# EAGLE board RHC12 (EAGLE 7.5.0)
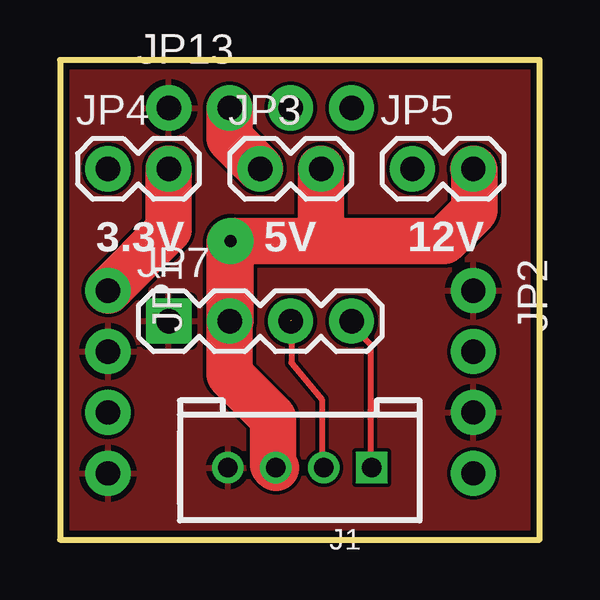
[diagram p0: board, top side]
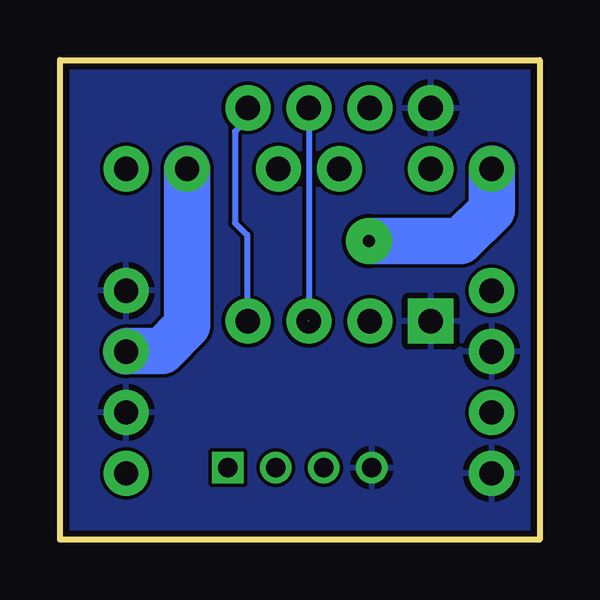
[diagram p1: board, bottom side, seen from below]

Size 20 x 20 mm. Coordinates in mm from the lower left corner, seen from the top.
Outline: 0,0 20,0 20,20 0,20 0,0
Copper layers (1*16): Top 0.035mm / dielectric 1.5mm / Bottom 0.035mm
Design rules "SeeedStudio_2layer_DRU_no_angle_20140221": minimum track width 6mil, minimum drill 12mil, track to track 6mil, track to pad 6mil, pad to pad 6mil, via to via 6mil, smd to smd 0mil, copper to edge 10mil, drill to drill 10mil, minimum pad ring 10mil, minimum via ring 6mil, stop-mask expansion 2mil, vias tented up to drill 100mil, thermal gap 10mil

## Footprints (pad centres in the part's own frame; a part is rotated, then mirrored left to right if it is on the bottom)
HW4-2.0 = drill 0.8 pad 1.27 square: 1 -3,0 | drill 0.8 pad 1.27: 2 -1,0; 3 1,0; 4 3,0
1X04_NO_SILK_ALL_ROUND = drill 1.016 pad 1.88: 1 0,0; 2 2.54,0; 3 5.08,0; 4 7.62,0
1X02 = drill 1.016 pad 1.88: 1 0,0; 2 2.54,0
1X04 = drill 1.016 pad 1.88 square: 1 0,0 | drill 1.016 pad 1.88: 2 2.54,0; 3 5.08,0; 4 7.62,0

## Placement (x,y rotation side)
J1  4P-2.0  [HW4-2.0]  10,3 180 top
JP1  [1X04_NO_SILK_ALL_ROUND]  2,10.38 270 top
JP2  [1X04_NO_SILK_ALL_ROUND]  17.24,10.38 270 top
JP3  [1X02]  8.35,15.46 0 top
JP4  [1X02]  2,15.46 0 top
JP5  [1X02]  14.7,15.46 0 top
JP7  [1X04]  4.54,9.11 0 top
JP13  [1X04_NO_SILK_ALL_ROUND]  4.54,18 0 top

## Library data of the parts
J1 = Seeed-OPL-Connector
JP1-JP5 JP7 JP13 = SparkFun-Connectors

## Nets
3.3V: JP1.1 JP4.2
5V: JP3.1 JP13.2
12V: JP2.2 JP5.1
GND: J1.4 JP1.2 JP1.4 JP2.1 JP2.3 JP7.1 JP13.1
S1: J1.2 JP7.3 JP13.3
S2: J1.1 JP7.4 JP13.4
VIN: J1.3 JP3.2 JP4.1 JP5.2 JP7.2

## Tracks (layer width: path | path; a pad name or v marks a point on that pad's centre or on a via)
3.3V
  Top 1.93: JP4.2 4.54,12.92 JP1.1
5V
  Top 1.93: JP13.2 7.08,16.73 JP3.1
12V
  Bottom 1.93: JP5.1 14.7,8.92 15.75,7.87 17.21,7.87 JP2.2
GND
  pour Bottom: 0,0 20,0 20,20 0,20
  pour Top: 0,0 20,0 20,20 0,20
S1  (1 unrouted)
  Top 0.254: 9.65,9.14 9.65,7.37 10.92,5.84 10.92,3.05 J1.2
  Bottom 0.254: JP13.3 JP7.3
S2
  Top 0.254: J1.1 12.95,3.05 12.95,8.13 12.19,8.89 JP7.4
  Bottom 0.254: JP13.4 12.16,17.56 12.7,17.02 12.7,13.21 12.19,12.7 12.19,9.14 JP7.4
VIN  (via drill 0.51 pad 1.93)
  Top 1.93: v7.11,12.45 7.11,9.14 JP7.2 | JP7.2 7.08,12.41 v7.11,12.45 | v7.11,12.45 11.18,12.45 | 11.18,12.45 16,12.45 17.27,13.72 17.27,15.43 JP5.2 | JP3.2 10.89,12.73 11.18,12.45 | JP7.2 7.08,6.89 8.89,5.08 8.89,3.11 J1.3
  Bottom 1.93: JP4.1 2,13.75 3.3,12.45 v7.11,12.45

## Text on the board
tPlace: 3.3V | 5V | 12V